# Altium PCB rs485.PcbDoc
Units mil, origin at the board's own origin, x right, y up, seen from the top; angles counter-clockwise.
Board outline 6000 x 4000 mil, 2 copper layers (Top Layer, Bottom Layer); 14 components, 22 nets, 87 pads, 21 vias.
Unrouted connection lines stored in the file: 3.
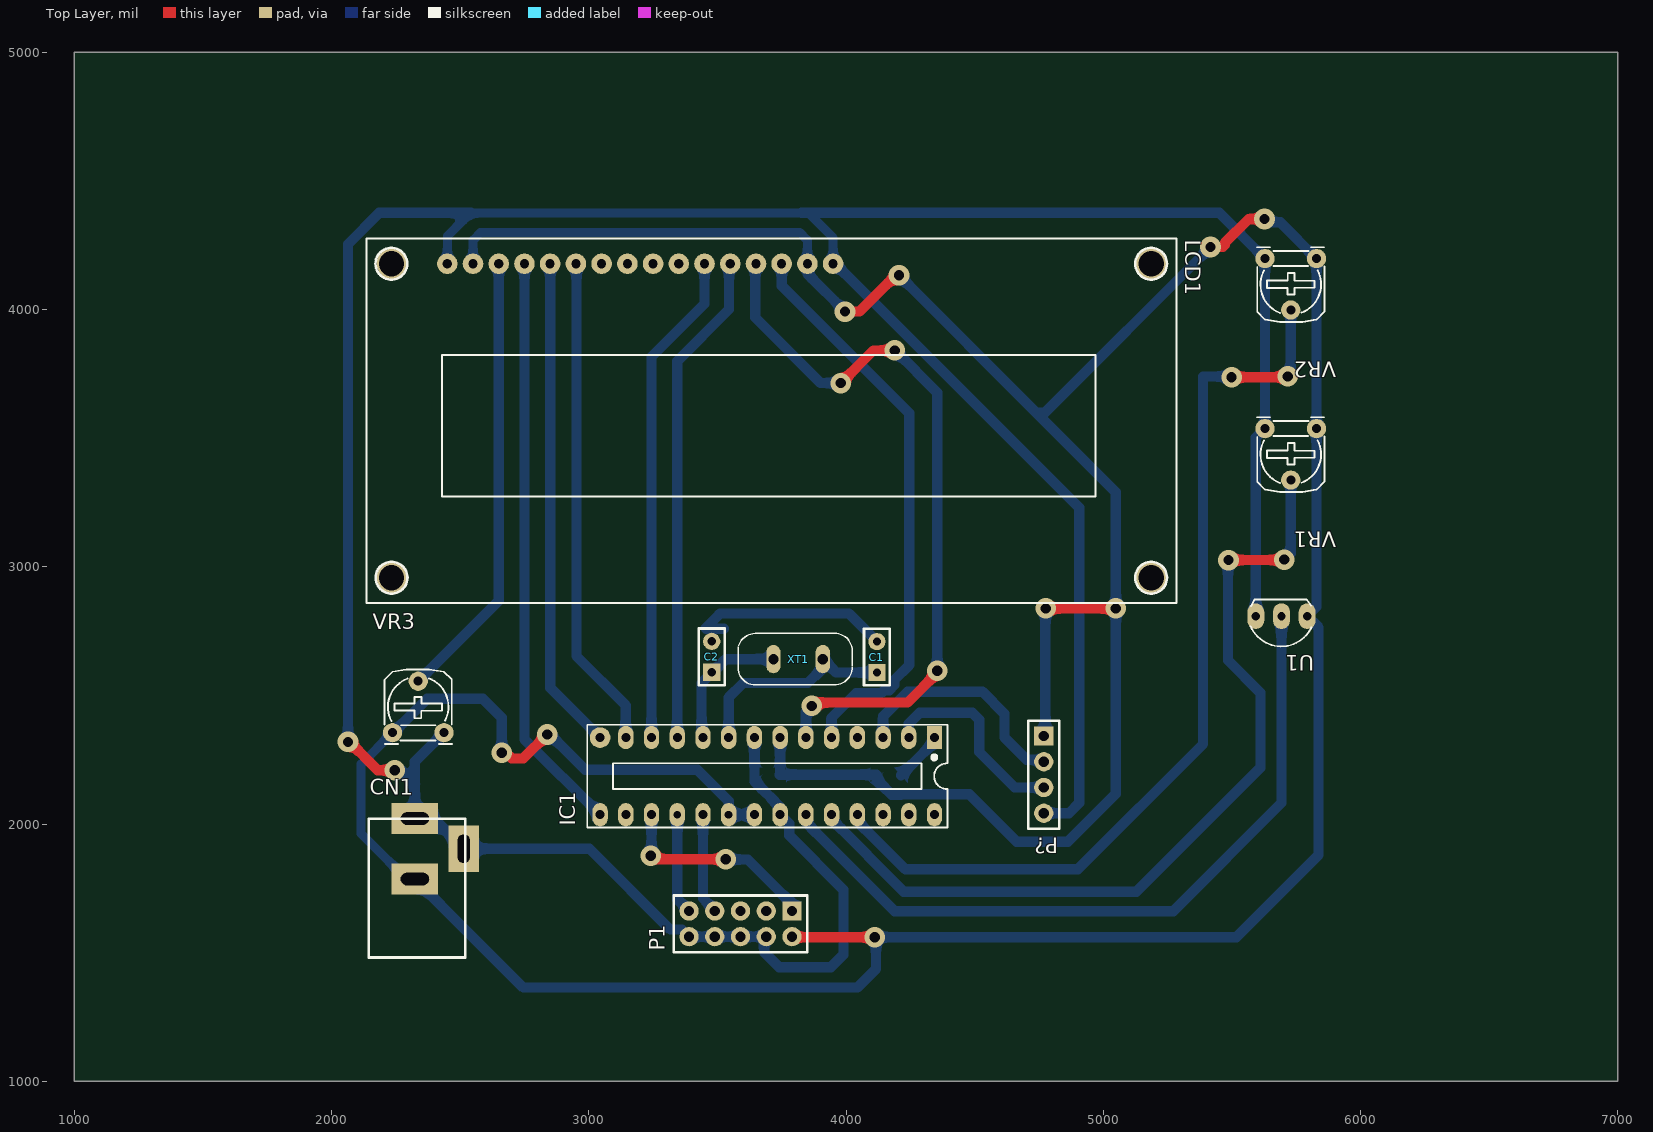
[diagram p0: Top Layer view]
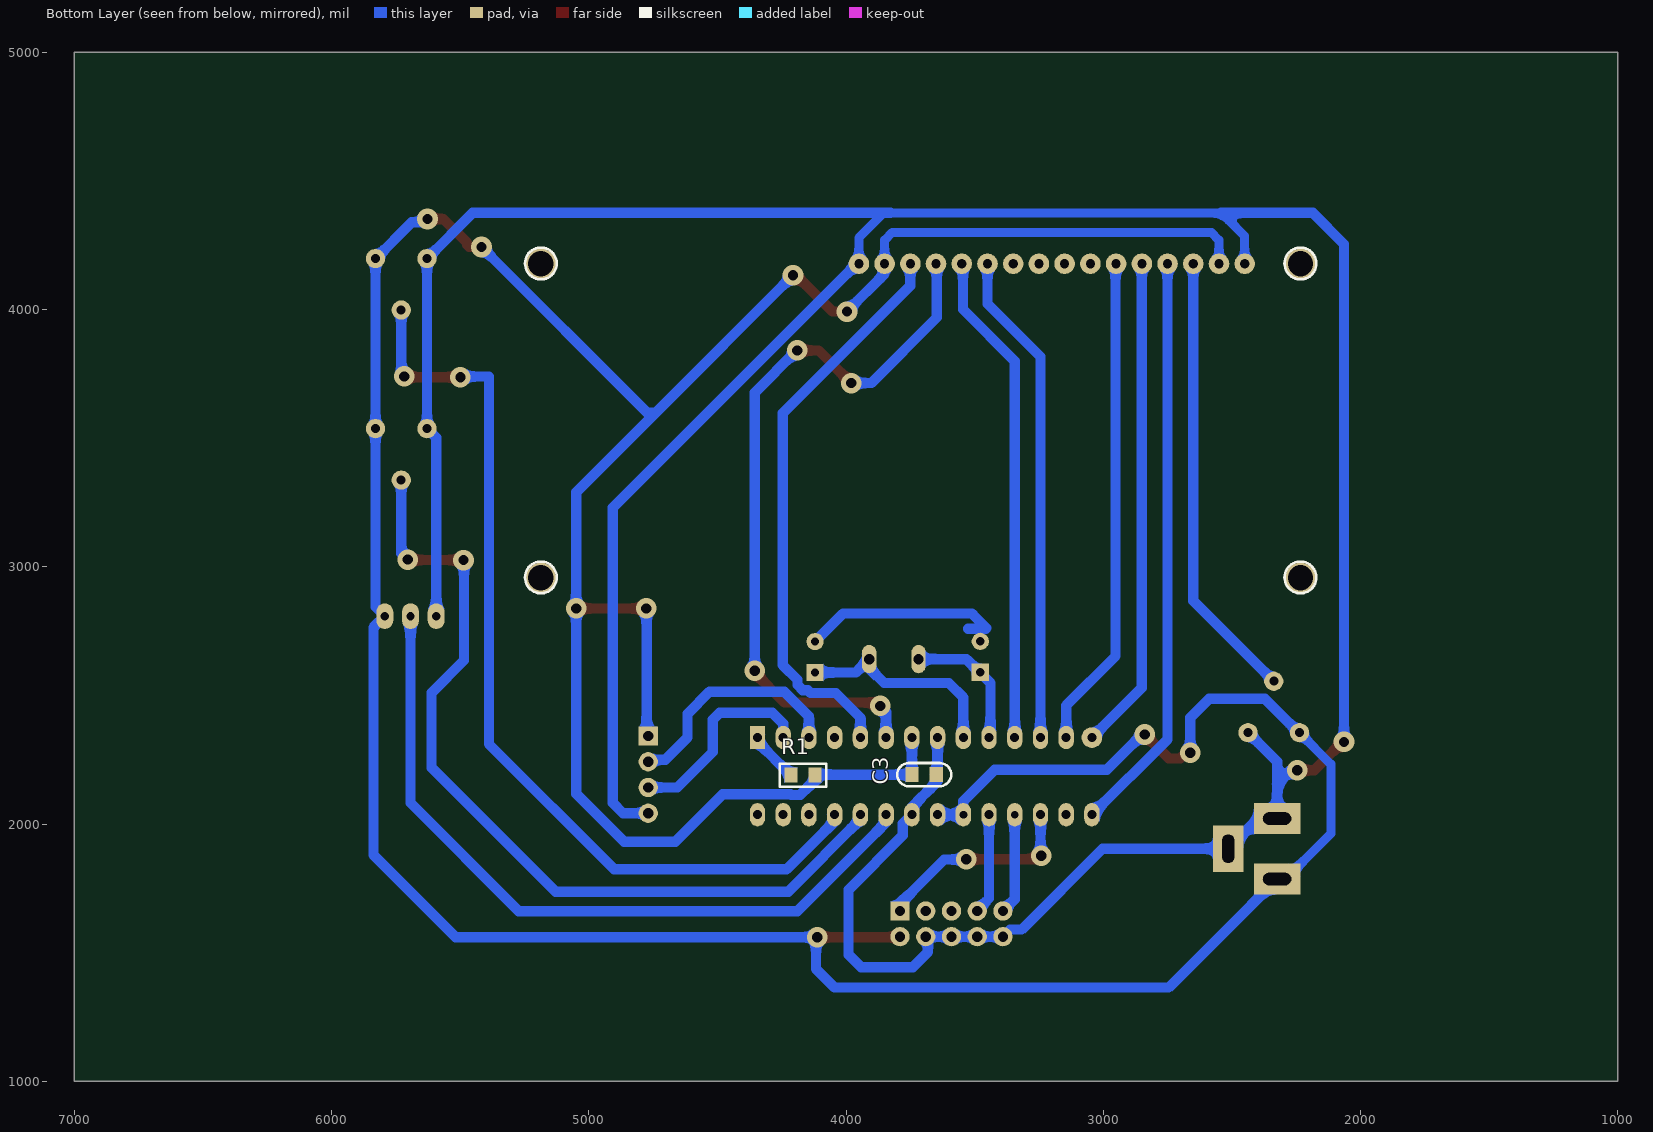
[diagram p1: Bottom Layer view, seen from below]
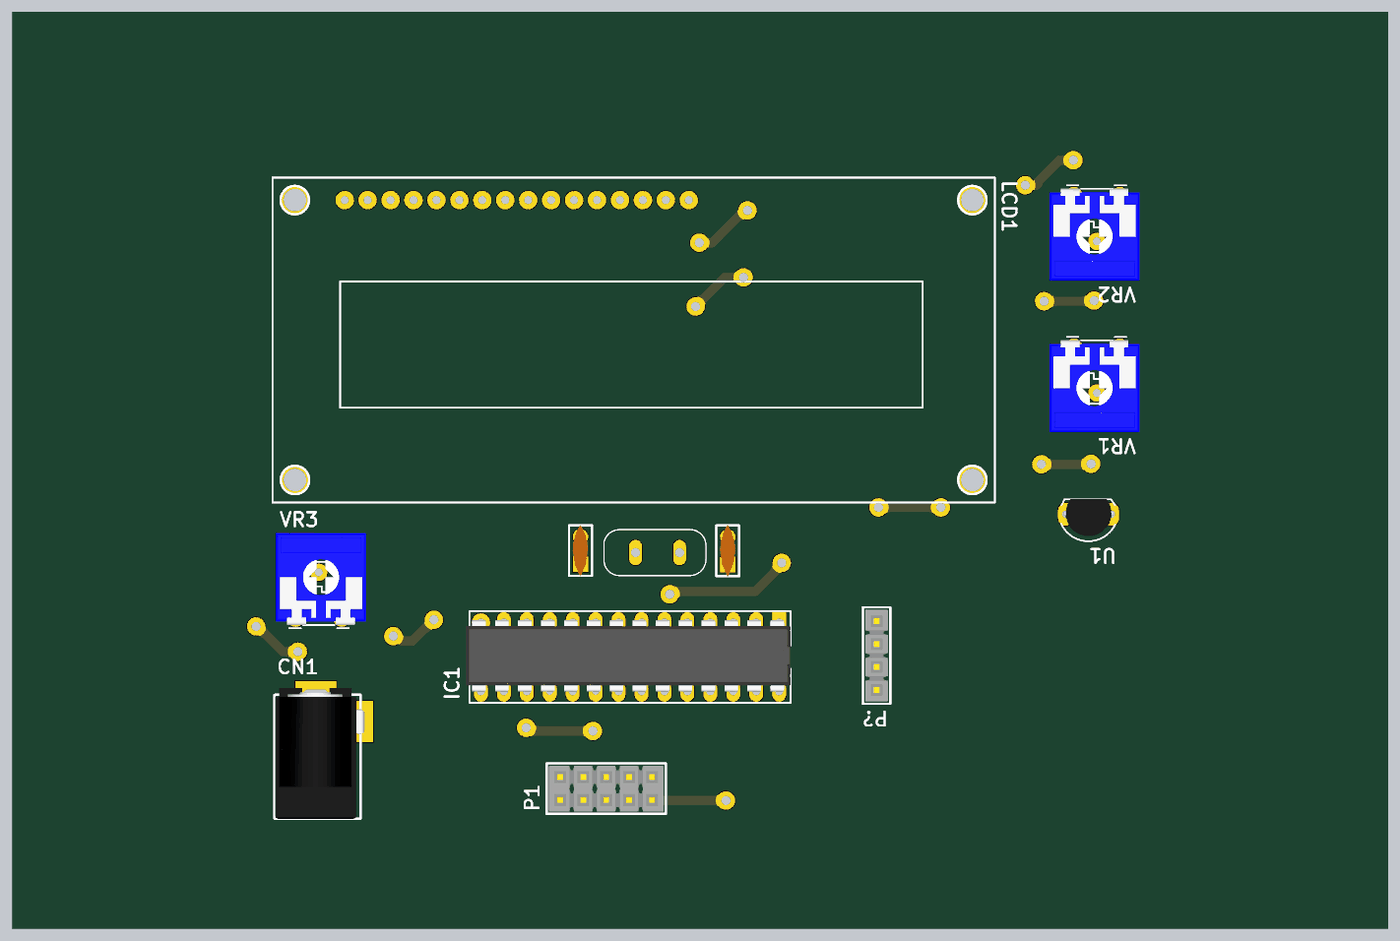
[diagram p2: 3D render of the assembled board from above, using the file's embedded part models]

## Layer stack, top to bottom
Top Solder: solder mask 0.4, Solder Resist, Dk 3.5
Top Layer: signal copper 1.4
Dielectric 1: dielectric 12.6, FR-4, Dk 4.8
Bottom Layer: signal copper 1.4
Bottom Solder: solder mask 0.4, Solder Resist, Dk 3.5

## Board outline
1000,1000 7000,1000 7000,5000 1000,5000

## Design rules (kind name [scope] priority, off if disabled: settings)
Clearance [All] p1: gap=15
PolygonConnect [All] p1: connectstyle=Relief reliefconductorwidth=10 reliefentries=4 polygonreliefangle="90 Angle" airgapwidth=10
RoomDefinition Rs485 [InComponentClass('Rs485')] p1: confinementstyle=ConfineIn formatcopy=TRUE lockcomponents=FALSE outline 7045,960 12385,960 12385,4230 7045,4230
RoutingVias [All] p1: holewidth=40 width=80 viastyle="Through Hole" minholewidth=40 minwidth=80 maxholewidth=40 maxwidth=80
SolderMaskExpansion [All] p1: expansion=4
Width [All] p1: maxlimit=40 minlimit=30 preferedwidth=35
30 further rules are at their usual default settings.

## Components (designator, comment, footprint, x,y, rotation, side; value= is the part's Value field where it differs from the comment)
C1 "Cap Non-pol" "Cap Non-Pol 3mm" 4120,2649 r90 top
C2 "Cap Non-pol" "Cap Non-Pol 3mm" 3478,2650 r90 top
C3 "Cap Non-pol" C-NP-0805 3696,2192 r0 bottom
CN1 "PS" "DC TERMINAL" 2324,1786 r90 top
IC1 "ATmega8-L" DIP28/W0.3 4344,2336 r180 top
LCD1 "LCD16x2A" LCD16X2 2450,4178 r0 top
P1 "Header 5x2" "Header 5x2" 3790,1662 r180 top
P? "Header 4" "Header 4" 4769,2342 r270 top
R1 "RESISTOR" R-0805 4167,2190 r180 bottom
U1 "LM35" QTO-92 5693,2808 r180 top
VR1 "10K" VR 5829,3537 r180 top
VR2 "10K" VR 5829,4198 r180 top
VR3 "10K" VR 2237,2355 r0 top
XT1 "Crystal2" Crystal.HC49/USxx 3718,2641 r90 top

## Footprints (in the part's own frame and the unit in brackets; to place one, negate y for a bottom-side part, rotate by r counter-clockwise, add the part's x,y. Pads: shape width x height; smd on the part's side, far side on the other; paste and mask are expansions set on the pad)
C-NP-0805 [mm] "Chip Capacitor; Non-polarized; Body 2.0 x 1.3 mm (LxW typ) [2012]"
  rect 1.3x1.5 smd: 1(-1.194,0) 2(1.194,0)
  silkscreen extent -2.67,-1.14 2.66,1.14, body extent -0.8,-0.43 0.8,0.43, height 0.79
"Cap Non-Pol 3mm" [mil] "Capacitor, Radial; Body 5.6 x 2.5 mm (L x W typ); Pin Spacing 3 mm (typ); Solder Pad 35mil"
  rect 67x67 hole 32: 1(-60,0)
  round 67 hole 32: 2(60,0)
  silkscreen extent -110,-50 110,50, body extent -115,-33 115,34, height 245
Crystal.HC49/USxx [mil] "HC49USxx package"
  rrect100% 110x56 hole 40: 1(0,0) 2(0,-192)
  silkscreen extent -100,-307 100,138, body extent -90,-298 90,128, height 200
"DC TERMINAL" [mil] "DC Terminal; Solder Pad 30mil"
  rect 120x180 hole 48 slot 110 at 90 deg: 1(0,0) 2(235,0)
  rect 180x120 hole 48 slot 110 at 0 deg: 3(118,-190)
  silkscreen extent -305,-195 235,180, body extent -305,-209 265,177, height 433
DIP28/W0.3 [mil] "28 PIN, W 300mil, Pin to pin 100mil"
  rect 60x90 hole 35: 1(0,0)
  oval 60x90 hole 35: 2(100,0) 3(200,0) 4(300,0) 5(400,0) 6(500,0) 7(600,0) 8(700,0) 9(800,0) 10(900,0) 11(1000,0) 12(1100,0) 13(1200,0) 15(1300,300) 16(1200,300) 17(1100,300) 19(900,300) 21(700,300) 22(600,300) 23(500,300) 24(400,300) 25(300,300) 26(200,300) 27(100,300) 28(0,300)
  round 80 hole 35: 14(1300,0)
  oval 60x90 hole 31: 18(1000,300) 20(800,300)
  silkscreen extent -50,-50 1350,350, body extent -50,-10 1367,300, height 200
"Header 4" [mil] "Connector; Header; 4 Position; Solder Pad 35mil"
  rect 75x75 hole 40: 1(0,0)
  round 75 hole 40: 2(100,0) 3(200,0) 4(300,0)
  silkscreen extent -60,-60 360,60, body extent -50,-50 350,50, height 330
"Header 5x2" [mil] "Connector; Header; 10 Position; 2 Rows; Solder Pad 35mil"
  rect 75x75 hole 40: 1(0,0)
  round 75 hole 40: 2(0,100) 3(100,0) 4(100,100) 5(200,0) 6(200,100) 7(300,0) 8(300,100) 9(400,0) 10(400,100)
  silkscreen extent -60,-60 460,160, body extent -50,-50 450,150, height 83
LCD16X2 [mm] "Character LCD 16x2"
  round 2.032 hole 0.9: 1(0,0) 2(2.54,0) 3(5.08,0) 4(7.62,0) 5(10.16,0) 6(12.7,0) 7(15.24,0) 8(17.78,0) 9(20.32,0) 10(22.86,0) 11(25.4,0) 12(27.94,0) 13(30.48,0) 14(33.02,0) 15(35.56,0) 16(38.1,0)
  round 3 hole 2.5 unplated: M1(-5.5,0) M2(69.5,0) M3(-5.5,-31) M4(69.5,-31)
  silkscreen extent -8,-33.5 72,2.5, body extent -8.01,-33.5 72,2.5, height 14.16
QTO-92 [mil] "TO-92"
  oval 66x100 hole 32: 1(-100,0) 2(0,0) 3(100,0)
  silkscreen extent -117,-65 120,118, body extent -109,-66 109,95, height 245
R-0805 [mm] "Chip Resistor; Body 2.0 x 1.3 mm (LxW typ) [2012]"
  rect 1.3x1.5 smd: 1(-1.194,0) 2(1.194,0)
  silkscreen extent -2.29,-1.14 2.29,1.14, body extent -0.95,-0.65 0.95,0.65, height 0.63
VR [mil] "Resistor Variable"
  round 75 hole 35: 1(0,0) 2(100,200) 3(200,0)
  silkscreen extent -31,-44 231,246, body extent -87,-30 307,372, height 165

## Part data
C1 C2 C3: "Non-polarized Capacitor"
CN1: library part CON.DCjack, "DC Power Jack, 2.5mm, KLD Series, PCB Mount"
IC1: "8-Bit AVR Microcontroller with 8K Bytes of In-System Programmable Flash Memory"
LCD1: library part LCD16x2, "LCD dipslay 16 char, 2 line"
P1: "Header, 10-Pin, 2-Row"
P?: "Header, 4-Pin"
R1: "Resistor"
U1: library part LM35_2, "Teminal"
VR1 VR2 VR3: library part VR, "Var Resistor"
XT1: "Quarz Crystal"

## Via types
v1: diameter 80, hole 40, Top Layer to Bottom Layer, 21 vias

## Nets (pads, with @x,y where several pads share a name; then routed paths per layer and width w, separated by ;. In a path a pad name is that pad's centre, name@x,y a point inside that pad or via, vN(x,y) a via of type N, cw(c..) or ccw(c..) an arc to the next point about the centre after c; other vN are vias at no path point)
D4: IC1.12 LCD1.11 | length 1927.3
  Bottom Layer w40: IC1.12 3244,3817 3450,4023 LCD1.11
D5: IC1.11 LCD1.12 | length 1927.3
  Bottom Layer w40: IC1.11 3344,3799 3545,4000 3545,4173 LCD1.12
D6: IC1.6 LCD1.13 | length 2925.7
  Top Layer w40: v1(3867,2459) 3880,2472 4239,2472 4355,2588 v1(4355,2596) ; v1(3980,3714) 4107,3841 v1(4189,3841)
  Bottom Layer w40: LCD1.13 3647,4175 3647,3969 3902,3714 v1(3980,3714) ; IC1.6 3844,2435 3874,2465 3873,2465 v1(3867,2459) ; v1(4189,3841) 4191,3841 4355,3677 v1(4355,2596)
D7: IC1.5 LCD1.14 | length 2241.4
  Bottom Layer w40: LCD1.14 3750,4093 4246,3597 4246,2617.78 4188.5,2560.28 4188.5,2541 4168,2520.5 4148.72,2520.5 4137.22,2509 4039,2509 3944,2414 IC1.5
E: IC1.13 LCD1.6 | length 1922.4
  Bottom Layer w40: LCD1.6 2952,4176 2952,2653 3144,2461 IC1.13
GND: C1.2 C2.2 C3.1 CN1.2 CN1.3 IC1.8 IC1.22 LCD1.1 LCD1.16 P1.4 P1.6 P1.8 P1.10 P?.4 U1.3 VR1.3 VR2.3 VR3.3 | length 13823.8
  Top Layer w40: v1(2064,2319) 2070,2319 2180,2209 v1(2246,2209)
  Bottom Layer w35: LCD1.1 2450,4285 2541,4376 3827,4376 ; 3853,4376 3950,4279 LCD1.16
  Bottom Layer w40: v1(2064,2319) 2064,4254 2186,4376 2541,4376 ; v1(2246,2209) 2270,2209 2324,2155 ; VR3.3 2324,2242 2324,2155 ; IC1.8 3644,2166 3744,2066 IC1.22 3779,2001 3779,1956 3990,1745 3990,1492 3941,1443 3741,1443 3681,1503 3681,1553 P1.4 P1.6 P1.8 P1.10 3362.5,1589.5 3317.5,1589.5 3003,1904 CN1.3 2397,2021 CN1.2 2324,2155 ; 3827,4376 3853,4376 5451,4376 VR2.3 VR1.3 5593,3501 U1.3 ; LCD1.16 3958.07,4178 4907,3229.07 4907,2082 4867,2042 P?.4
"LM35 OUT": IC1.23 U1.2 | length 2922.3
  Bottom Layer w40: IC1.23 3844,2006 4189,1661 5272,1661 5693,2082 U1.2
MISO: IC1.18 P1.9 | length 393.1
  Bottom Layer w40: IC1.18 3344,1708 P1.9
MOSI: IC1.17 P1.1 | length 814.7
  Top Layer w40: v1(3241,1877) 3242,1876 3255,1876 3268,1863 v1(3532,1863)
  Bottom Layer w40: v1(3241,1877) 3244,1880 IC1.17 ; v1(3532,1863) 3533,1862 3618,1862 3790,1690 P1.1
NC: P1.3
NetC1_1: C1.1 IC1.9 XT1.2 | length 835.8
  Bottom Layer w40: IC1.9 3544,2492 3600,2548 3852,2548 3910,2606 XT1.2 3962,2589 C1.1
NetC2_1: C2.1 IC1.10 XT1.1 | length 532.4
  Bottom Layer w40: IC1.10 3438,2342 3438,2547 3532,2641 XT1.1
"OUT CB 2": IC1.24 VR1.2 | length 3398.2
  Top Layer w40: v1(5487,3026) 5702,3026 v1(5704,3028)
  Bottom Layer w40: IC1.24 3944,2018 4225,1737 5129,1737 5611,2219 5611,2510 5485,2636 5485,3024 v1(5487,3026) ; v1(5704,3028) 5729,3053 VR1.2
"OUT CB 3": IC1.25 VR2.2 | length 3671.6
  Top Layer w40: v1(5499,3737) 5709,3737 5712,3740 v1(5717,3740)
  Bottom Layer w40: IC1.25 4044,2011 4231,1824 4901,1824 5388,2311 5388,3740 5496,3740 v1(5499,3737) ; v1(5717,3740) 5729,3752 VR2.2
RS: IC1.15 LCD1.4 | length 2263.8
  Bottom Layer w40: LCD1.4 2750,2330 IC1.15
RST: IC1.1 P1.5 R1.1 | length 199.8
  Bottom Layer w40: R1.1 4344,2320 IC1.1
RW: IC1.14 LCD1.5 | length 1922.4
  Bottom Layer w40: LCD1.5 2850,2530 IC1.14
RX: IC1.2 P?.3 | length 791.2
  Bottom Layer w40: IC1.2 4244,2390 4287,2433 4491,2433 4518,2406 4518,2280 4656,2142 P?.3
SCK: IC1.19 P1.7 | length 393.1
  Bottom Layer w40: IC1.19 3444,1710.53 3490,1664.53 P1.7
TX: IC1.3 P?.2 | length 913.7
  Bottom Layer w40: IC1.3 4144,2418.72 4239.28,2514 4531,2514 4616,2429 4616,2337 4703,2250 4761,2250 P?.2
VCC: C3.2 CN1.1 IC1.7 IC1.20 IC1.21 LCD1.2 LCD1.15 P1.2 P?.1 R1.2 U1.1 VR1.1 VR2.1 VR3.1 | length 17507.5
  Top Layer w40: v1(2662,2277) 2678,2277 2700,2255 2746,2255 v1(2839,2348) ; P1.2 3792,1560 v1(4112,1560) ; v1(3996,3992) 4052,3992 4193,4133 v1(4206,4133) ; v1(4777,2838) v1(5049,2838) ; v1(5417,4243) 5465,4243 5473,4251 5473,4260 5565,4352 v1(5627,4352)
  Bottom Layer w35: VR3.1 2115,2233 2115,1963 2292,1786 CN1.1 ; LCD1.2 2550,4270 2580,4300 3820,4300 3850,4270 LCD1.15
  Bottom Layer w40: VR3.1 2239.53,2355 2371.53,2487 2588,2487 2662,2413 v1(2662,2277) ; CN1.1 2746,1364 4044,1364 4117,1437 4117,1555 v1(4112,1560) 5517,1560 5837,1880 5837,2764 U1.1 5829,2844 VR1.1 VR2.1 5688,4339 5627,4339 v1(5627,4352) ; v1(2839,2348) 2848,2339 2858,2339 2986,2211 3422,2211 3544,2089 IC1.20 IC1.21 ; IC1.7 3744,2193 C3.2 4118,2192 R1.2 4120,2171 4178.04,2112.96 4214.04,2112.96 4217.08,2116 4479,2116 4664,1931 4862,1931 5049,2118 v1(5049,2838) 5049,3290 4740,3599 ; LCD1.15 3850,4139 3996,3993 v1(3996,3992) ; v1(4206,4133) 4740,3599 ; P?.1 4775,2348 4775,2828 4777,2830 4773,2834 4772,2834 4776,2838 v1(4777,2838) ; v1(5417,4243) 4773,3599 4740,3599
VSS: LCD1.3 VR3.2 | length 1752.6
  Bottom Layer w40: VR3.2 2650,2868 LCD1.3
pads on no net: IC1.4 IC1.16 IC1.26 IC1.27 IC1.28 LCD1.7 LCD1.8 LCD1.9 LCD1.10 LCD1.M1 LCD1.M2 LCD1.M3 LCD1.M4
copper on no net: | length 805.7
  Bottom Layer w40: 3525.94,2758.94 3457.06,2758.94 3454,2762 3496.5,2804.5 3510,2818 3909,2818 4012,2818 4119,2711